# EAGLE board aq_shield (EAGLE 5.11)
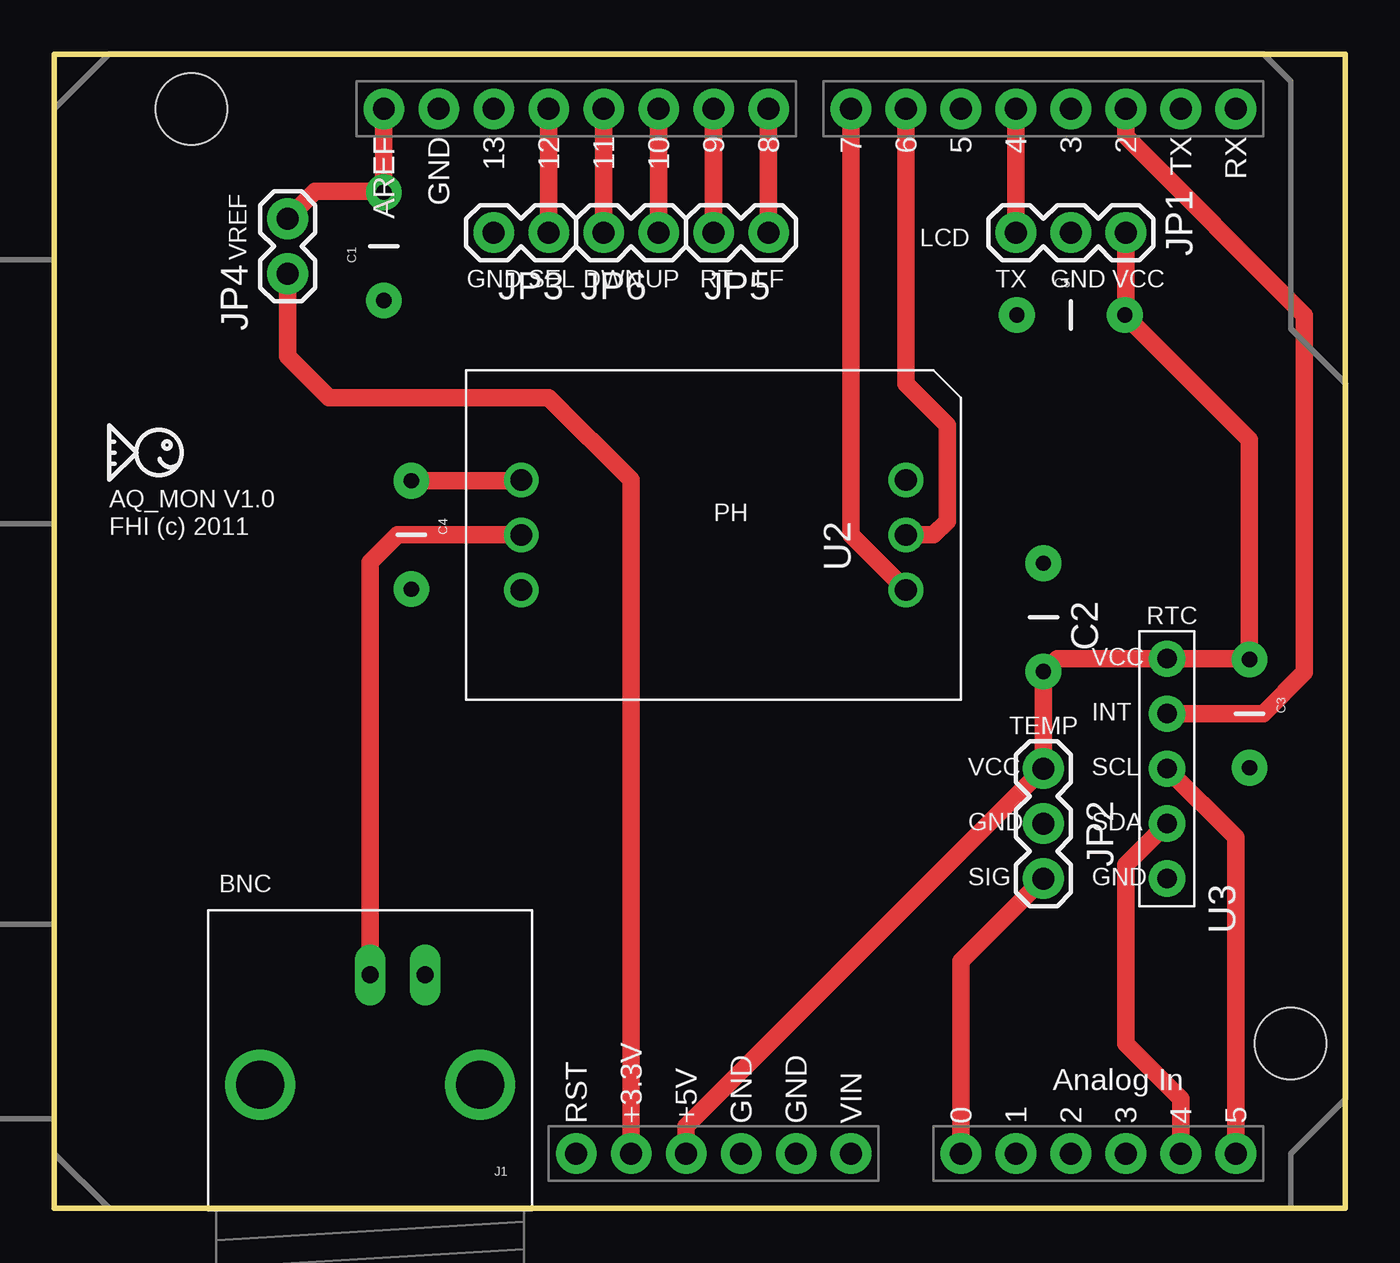
[diagram p0: board, top side]
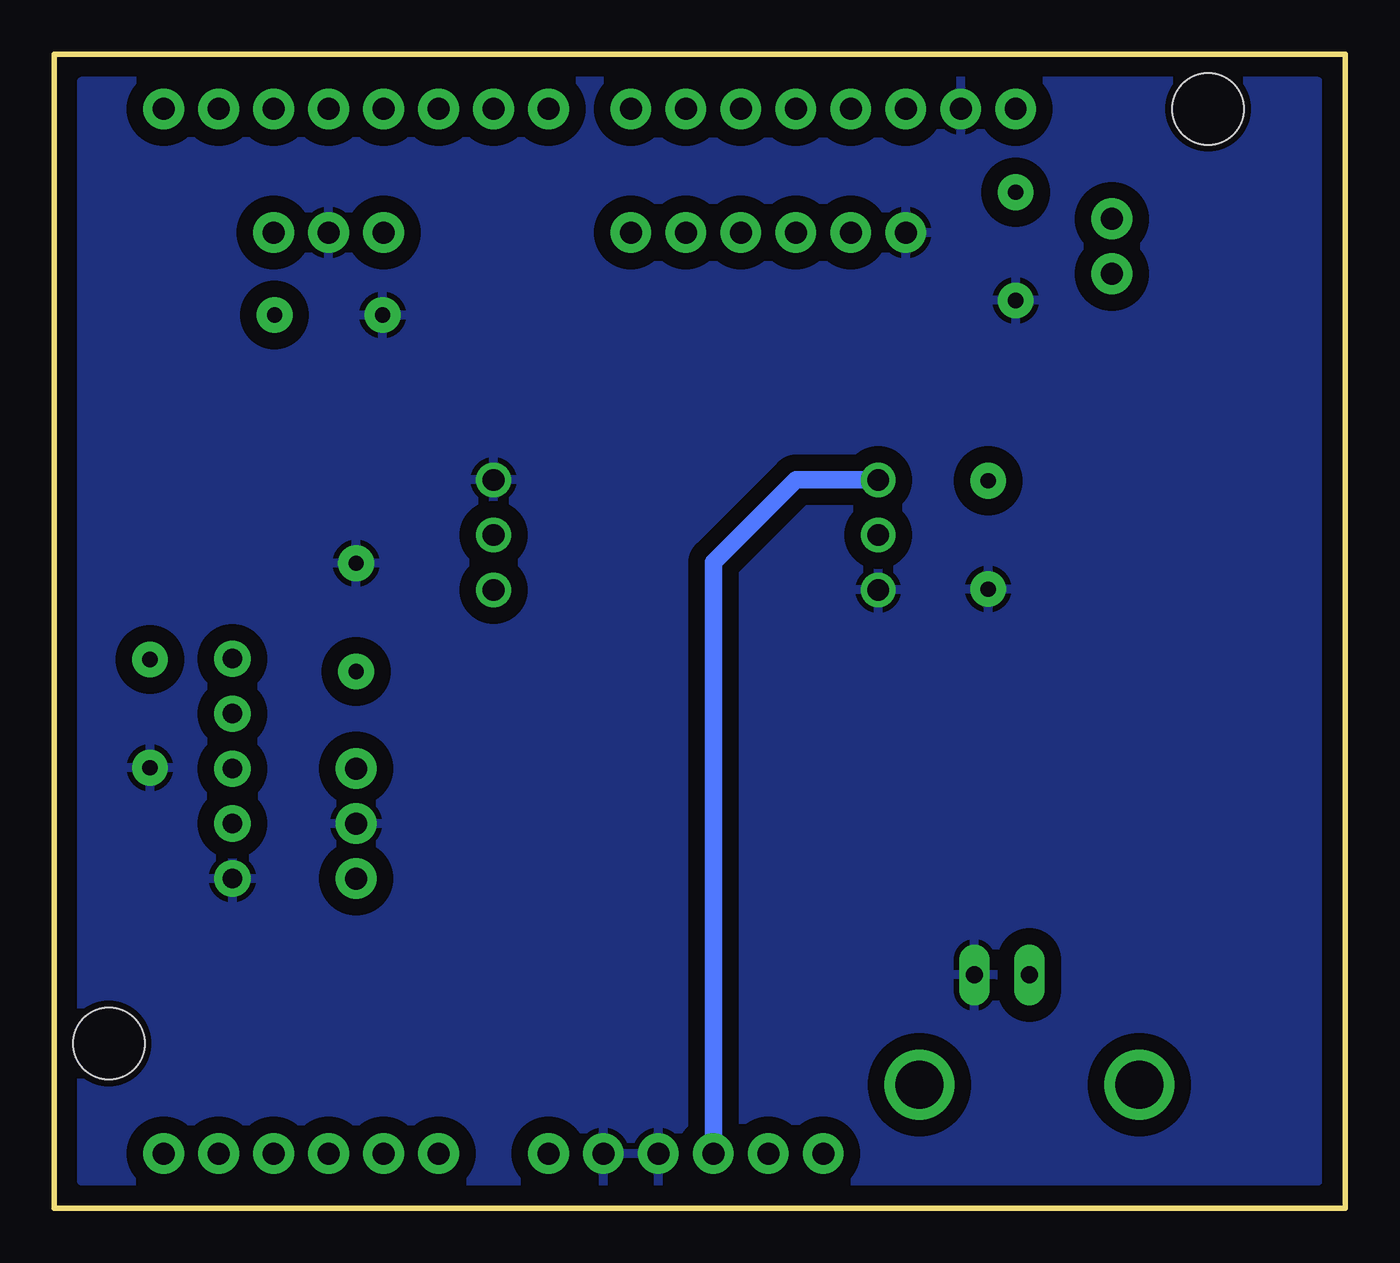
[diagram p1: board, bottom side, seen from below]

Size 59.68 x 53.33 mm. Coordinates in mm from the lower left corner, seen from the top.
Outline: 0,0 59.68,0 59.68,53.33 0,53.33 0,0
Copper layers (1*16): Top 0.035mm / dielectric 1.5mm / Bottom 0.035mm
Design rules "SparkFun_via *": minimum track width 8mil, minimum drill 20mil, track to track 30mil, track to pad 30mil, pad to pad 8mil, via to via 8mil, smd to smd 8mil, copper to edge 10mil, drill to drill 8mil, minimum pad ring 12mil, minimum via ring 10mil, stop-mask expansion 4mil, vias tented up to drill 25mil, thermal gap 10mil

## Footprints (pad centres in the part's own frame; a part is rotated, then mirrored left to right if it is on the bottom)
CAP-PTH-5MM = drill 0.7 pad 1.651 round: 1 -2.5,0; 2 2.5,0
BNC = drill 2.2 round: 3 -5.08,5.08; 4 5.08,5.08 | drill 0.8 long: GND -2.54,0; S 0,0
1X03 = drill 1.016 pad 1.88 round: 1 0,0; 2 2.54,0; 3 5.08,0
1X02 = drill 1.016 pad 1.88 round: 1 0,0; 2 2.54,0
DUEMILANOVE_SHIELD = drill 1.016 pad 1.88 round: 3.3V 50.8,26.67; 5V 50.8,29.21; A0 50.8,41.91; A1 50.8,44.45; A2 50.8,46.99; A3 50.8,49.53; A4 50.8,52.07; A5 50.8,54.61; AREF 2.54,15.24; D2 2.54,49.53; D3 2.54,46.99; D4 2.54,44.45; D5 2.54,41.91; D6 2.54,39.37; D7 2.54,36.83; D8 2.54,33.02; D9 2.54,30.48; D10 2.54,27.94; D11 2.54,25.4; D12 2.54,22.86; D13 2.54,20.32; GND@0 50.8,31.75; GND@1 50.8,34.29; GND@2 2.54,17.78; RES 50.8,24.13; RX 2.54,54.61; TX 2.54,52.07; VIN 50.8,36.83 | hole 3.302: 45.72,57.15; 2.54,6.35
PH_STAMP = drill 1 round: GND1 10.16,2.54; GND2 5.08,20.32; PRB 7.62,2.54; RX 10.16,20.32; TX 7.62,20.32; VCC 5.08,2.54
FUTURLEC_RTC_HEADER = drill 0.9 pad 1.676 round: GND 1.27,12.7; INT 1.27,5.08; SCL 1.27,7.62; SDA 1.27,10.16; VCC 1.27,2.54

## Placement (x,y rotation side)
C1  VREF  [CAP-PTH-5MM]  15.24,44.45 90 top
C2  RTC  [CAP-PTH-5MM]  45.72,27.3 270 top
C3  TEMP  [CAP-PTH-5MM]  55.24,22.86 270 top
C4  PH  [CAP-PTH-5MM]  16.51,31.11 270 top
C5  LCD  [CAP-PTH-5MM]  46.99,41.27 0 top
J1  BNC  [BNC]  14.61,10.79 180 top
JP1  LCD  [1X03]  49.53,45.09 180 top
JP2  TEMP  [1X03]  45.72,15.24 90 top
JP3  SEL  [1X02]  22.86,45.09 180 top
JP4  VREF  [1X02]  10.79,43.18 90 top
JP5  L_R  [1X02]  33.02,45.09 180 top
JP6  U_D  [1X02]  27.94,45.09 180 top
U1  ARDUINO_SHIELDLABEL  [DUEMILANOVE_SHIELD]  0,53.34 270 top
U2  PH_STAMP  [PH_STAMP]  19.05,38.73 270 top
U3  FUTURLEC_RTC_HEADER  [FUTURLEC_RTC_HEADER]  52.7,27.94 180 top
U$1  FHI_LOGO  [FHI_LOGO]  3.81,34.92 0 top

## Library data of the parts
C1-C5 JP1-JP6 U1 = SparkFun
J1 U2 U3 U$1 = CyberRailGuru

## Nets
DOWN: JP6.2 U1.D11
GND: C1.1 C2.1 C3.2 C4.2 C5.1 J1.GND JP1.2 JP2.2 JP3.2 U1.GND@0 U1.GND@1 U1.GND@2 U2.GND1 U2.GND2 U3.GND
LCD_TX: JP1.3 U1.D4
LEFT: JP5.1 U1.D8
N$1: J1.S U2.PRB
N$2: JP4.1 U1.3.3V
N$7: C1.2 JP4.2 U1.AREF
PH_RX: U1.D6 U2.TX
PH_TX: U1.D7 U2.RX
RIGHT: JP5.2 U1.D9
RTC_INT: U1.D2 U3.INT
RTC_SCL: U1.A5 U3.SCL
RTC_SDA: U1.A4 U3.SDA
SELECT: JP3.1 U1.D12
TEMP_SENSE: JP2.1 U1.A0
UP: JP6.1 U1.D10
VCC: C2.2 C3.1 C4.1 C5.2 JP1.1 JP2.3 U1.5V U2.VCC U3.VCC

## Tracks (layer width: path | path; a pad name or v marks a point on that pad's centre or on a via)
DOWN
  Top 0.813: JP6.2 U1.D11
GND
  pour Bottom: 1.27,1.27 1.27,52.07 58.42,52.07 58.42,1.27
LCD_TX
  Top 0.813: JP1.3 U1.D4
LEFT
  Top 0.813: JP5.1 U1.D8
N$1
  Top 0.813: U2.PRB 15.88,31.11 14.61,29.84 J1.S
N$2
  Top 0.813: U1.3.3V 26.67,33.66 22.86,37.47 12.7,37.47 10.79,39.37 JP4.1
N$7
  Top 0.813: U1.AREF C1.2 15.2,46.99 12.06,46.99 JP4.2
PH_RX
  Top 0.813: U1.D6 39.37,38.1 41.27,36.2 41.27,31.75 40.64,31.11 U2.TX
PH_TX
  Top 0.813: U1.D7 36.83,31.11 U2.RX
RIGHT
  Top 0.813: JP5.2 U1.D9
RTC_INT
  Top 0.813: U3.INT 55.88,22.86 57.78,24.77 57.78,41.27 49.53,49.53 U1.D2
RTC_SCL
  Top 0.813: U3.SCL 54.61,17.14 U1.A5
RTC_SDA
  Top 0.813: U3.SDA 49.53,15.88 49.53,7.62 52.07,5.08 U1.A4
SELECT
  Top 0.813: JP3.1 U1.D12
TEMP_SENSE
  Top 0.813: U1.A0 41.91,11.43 JP2.1
UP
  Top 0.813: JP6.1 U1.D10
VCC
  Top 0.813: U1.5V 29.21,3.81 JP2.3 C2.2 45.76,24.8 46.35,25.4 U3.VCC 55.2,25.4 C3.1 55.24,35.52 C5.2 49.53,41.31 JP1.1 | C4.1 21.55,33.62 U2.VCC
  Bottom 0.813: U2.VCC 25.4,33.66 29.21,29.84 U1.5V

## Text on the board
tPlace: VREF | LCD | GND | SEL | DWN | UP | RT | LF | TX | GND | VCC | AQ_MON V1.0 | PH | FHI (c) 2011 | RTC | VCC | INT | TEMP | VCC | SCL | GND | SDA | BNC | SIG | GND